# Altium PCB PCB1.PcbDoc (part 10 of 10)
Units mil, origin at the board's own origin, x right, y up, seen from the top; angles counter-clockwise.
Board outline 3664.99 x 3139.98 mil, 2 copper layers (Top Layer, Bottom Layer); 40 components, 43 nets, 180 pads, 41 vias.
Unrouted connection lines stored in the file: 5.
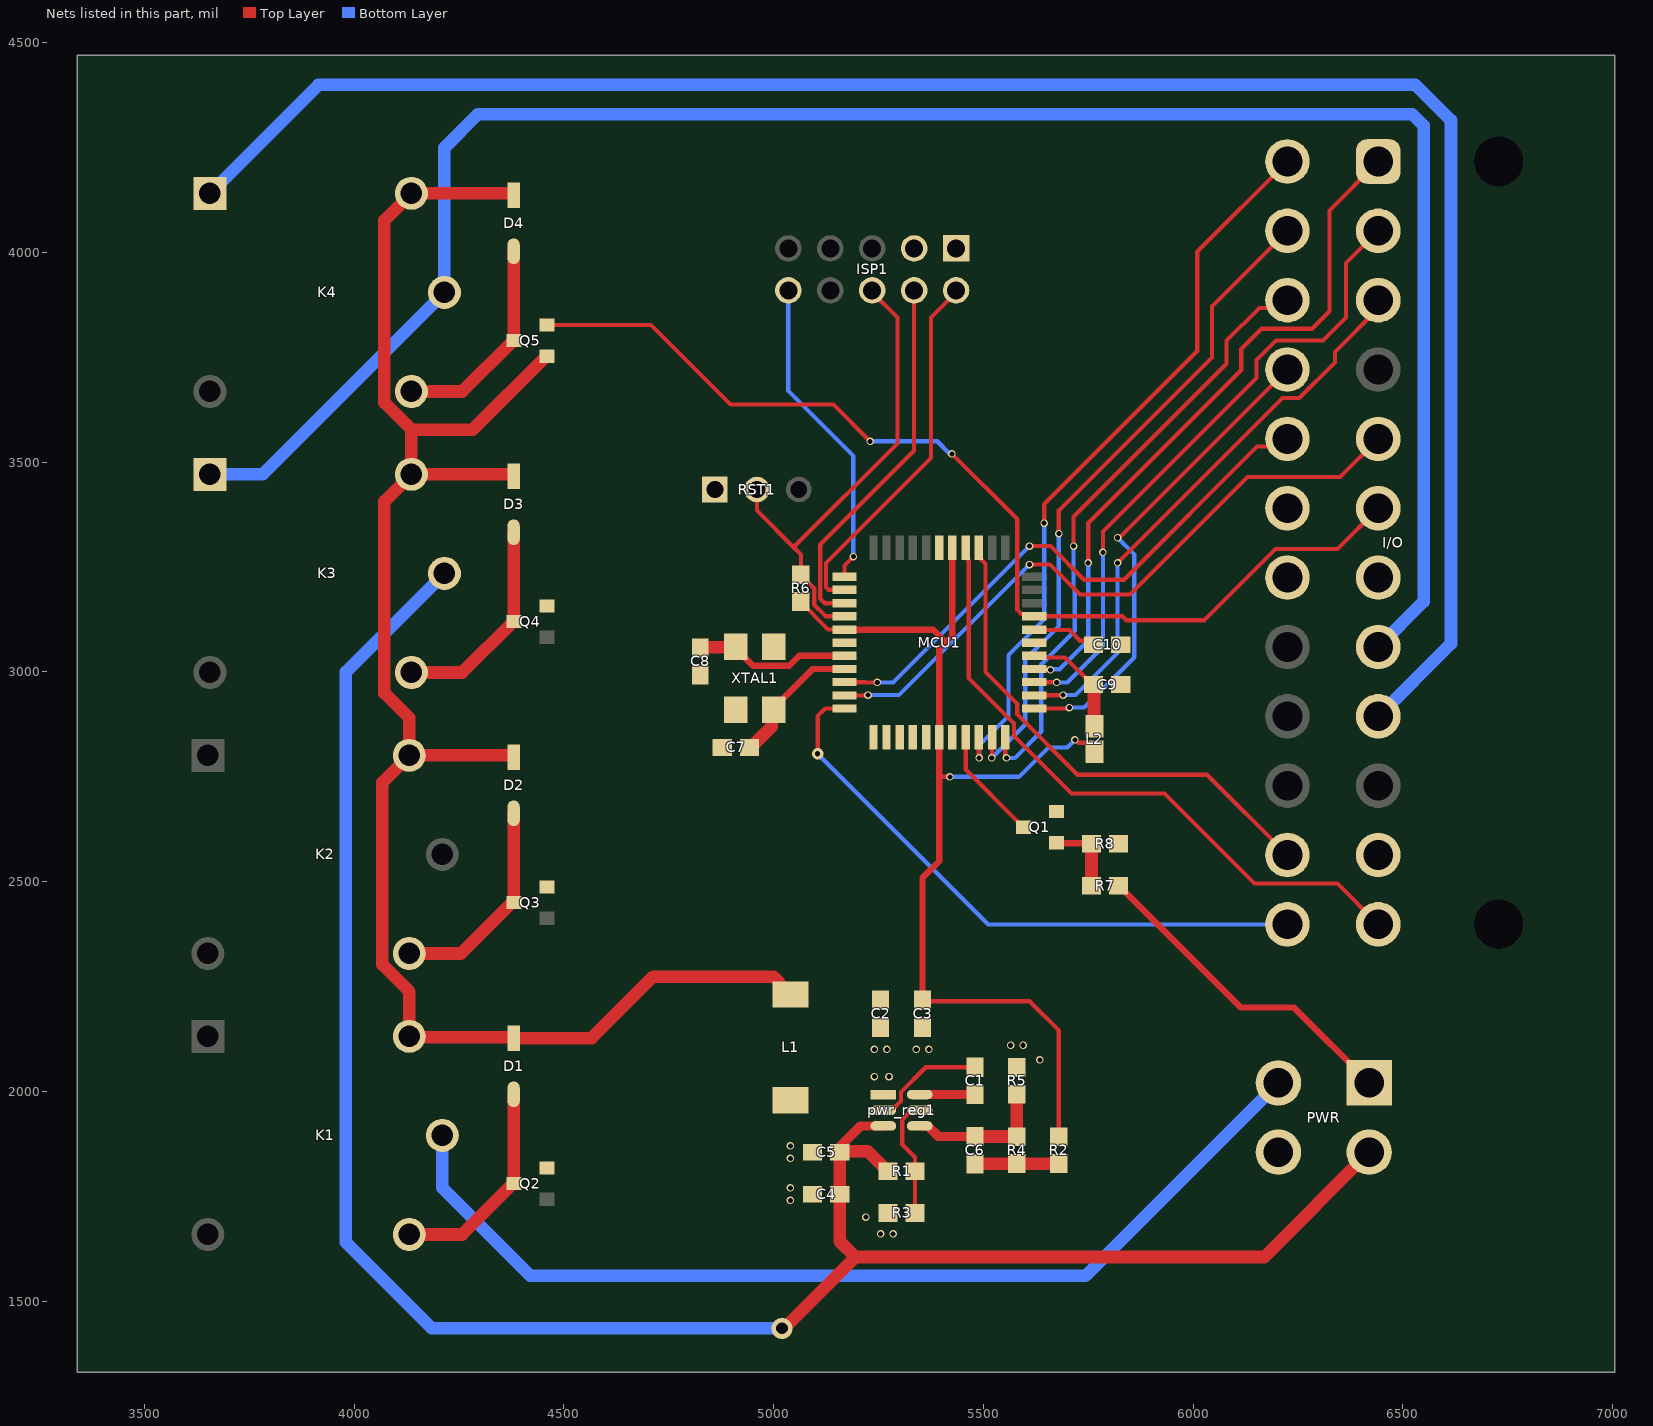
[diagram p10: the nets of this part, all layers, seen from the top]

## Footprints (in the part's own frame and the unit in brackets; to place one, negate y for a bottom-side part, rotate by r counter-clockwise, add the part's x,y. Pads: shape width x height; smd on the part's side, far side on the other; paste and mask are expansions set on the pad)
3M-30310-6002HB-10_V [mm] "CONN, 10-Leads, Body 20.3x8.4mm, Pitch 2.54mm"
  rect 1.6x1.6 hole 1.09: 1(-5.08,-1.27)
  round 1.6 hole 1.09: 2(-5.08,1.27) 3(-2.54,-1.27) 4(-2.54,1.27) 5(0,-1.27) 6(0,1.27) 7(2.54,-1.27) 8(2.54,1.27) 9(5.08,-1.27) 10(5.08,1.27)
  silkscreen extent -10.15,-4.92 10.15,4.58, body extent -10.15,-4.2 10.15,4.61, height 8.89
649024227222 [mm] "4.20mm Male Dual Row Angled Header with Mounting Pegs, 24p"
  rrect50% 2.7x2.7 hole 1.8: 1(23.1,7.5)
  round 2.7 hole 1.8: 2(18.9,7.5) 3(14.7,7.5) 4(10.5,7.5) 5(6.3,7.5) 6(2.1,7.5) 7(-2.1,7.5) 8(-6.3,7.5) 9(-10.5,7.5) 10(-14.7,7.5) 11(-18.9,7.5) 12(-23.1,7.5) 13(23.1,13) 14(18.9,13) 15(14.7,13) 16(10.5,13) 17(6.3,13) 18(2.1,13) 19(-2.1,13) 20(-6.3,13) 21(-10.5,13) 22(-14.7,13) 23(-18.9,13) 24(-23.1,13)
  round 3 hole 3 unplated: MH1(-23.1,0.2) MH2(23.1,0.2)
  silkscreen extent -25.95,-6.52 25.95,6.52, body extent -25.8,-6.4 26.1,13.57, height 11.43
FP-1-1721150-0-MFG [mm]
  rect 2x2 hole 1.3 paste-2539.97 mask+0: 1(-6.2,6)
  round 2 hole 1.3 paste-2539.97 mask+0: 2(6,6) 3(8,0) 4(-6.2,-6) 5(6,-6)
  silkscreen extent -9.85,-8 9.85,8.62, body extent -9.95,-8.1 9.95,8.1, height 0.25
FP-1586042-4-MFG [mm]
  rect 2.75x2.75 hole 1.8 paste-2539.97 mask+0: 1(2.1,7.6)
  round 2.75 hole 1.8 paste-2539.97 mask+0: 2(-2.1,7.6) 3(2.1,13.1) 4(-2.1,13.1)
  silkscreen extent -4.97,-7 5.62,7.72, body extent -5.07,-7.1 5.07,14.58, height 0.25
FP-CBMF1608-IPC_A [mil]
  rect 53.36x43.55 smd paste+0 mask+0: 1(-30.53,0) 2(30.53,0)
  silkscreen extent -57,-38 57,38, body extent -77,-41 77,41, height 10
FP-CL10-IPC_A [mil]
  rect 45.6x39.85 smd paste+0 mask+0: 1(-32.56,0) 2(32.56,0)
  silkscreen extent -55,-36 55,36, body extent -75,-40 75,40, height 10
FP-CRCW0603-e3-IPC_A [mil]
  rect 44.69x41.82 smd paste+0 mask+0: 1(-32.1,0) 2(32.1,0)
  silkscreen extent -30,-37 30,37, body extent -74,-41 74,41, height 10
FP-DDC0006A-IPC_B [mm]
  rect 1.554x0.572 smd paste+0 mask+0: 1(-1.1,0.95)
  rrect100% 1.554x0.572 smd paste+0 mask+0: 2(-1.1,0) 3(-1.1,-0.95) 4(1.1,-0.95) 5(1.1,0) 6(1.1,0.95)
  silkscreen extent -2.57,-1.7 1.4,1.7, body extent -2.13,-1.7 2.13,1.7, height 0.25
FP-LFXTAL055663REEL-MFG [mm]
  rect 1.6x1.4 smd paste+0 mask+0: 1(-1.9,-1.15) 2(1.9,-1.15) 3(1.9,1.15) 4(-1.9,1.15)
  silkscreen extent -3.42,-1.67 2.58,1.67, body extent -2.8,-1.95 2.8,1.95, height 0.25
FP-SOD123-IPC_A [mil]
  rect 61.32x29.23 smd paste+0 mask+0: 1(-66.94,0)
  rrect100% 61.32x29.23 smd paste+0 mask+0: 2(66.94,0)
  silkscreen extent -134,-31 52,31, body extent -117,-50 117,50, height 10
FP-SOT23-MFG [mm]
  rect 0.9x0.8 smd paste+0 mask+0: 1(-1,0.95) 2(-1,-0.95) 3(1,0)
  silkscreen extent -0.18,-1.5 0.7,1.5, body extent -1.55,-1.6 1.55,1.6, height 0.25
MOLX-22-28-4033_V [mm] "THD, 3-Leads, Body 7.62x2.49mm, Pitch 2.54mm"
  rect 1.55x1.55 hole 1.02: 1(-2.54,0)
  round 1.55 hole 1.02: 2(0,0) 3(2.54,0)
  silkscreen extent -4.58,-1.25 3.81,1.25, body extent -3.81,-1.24 3.81,1.24, height 8.38
QFP80P1200X1200X120-44N [mil]
  rect 58x20 smd: 1(-226,157) 2(-226,126) 3(-226,94) 4(-226,63) 5(-226,31) 6(-226,0) 7(-226,-31) 8(-226,-63) 9(-226,-94) 10(-226,-126) 11(-226,-157) 23(226,-157) 24(226,-126) 25(226,-94) 26(226,-63) 27(226,-31) 28(226,0) 29(226,31) 30(226,63) 31(226,94) 32(226,126) 33(226,157)
  rect 20x58 smd: 12(-157,-226) 13(-126,-226) 14(-94,-226) 15(-63,-226) 16(-31,-226) 17(0,-226) 18(31,-226) 19(63,-226) 20(94,-226) 21(126,-226) 22(157,-226) 34(157,226) 35(126,226) 36(94,226) 37(63,226) 38(31,226) 39(0,226) 40(-31,226) 41(-63,226) 42(-94,226) 43(-126,226) 44(-157,226)
  silkscreen extent -309,-309 308,311, body extent -236,-236 236,236, height 47
WE-PD_7345 [mm] "SMT Shielded Power Inductor, 2-leads, body 7.3x7.3mm"
  rect 1.6x2.2 smd: 1(-3.2,0) 2(3.2,0)
  Top Layer keep-out region: -3.65,-3.65 -3.65,-1.3 -2.2,-1.3 -2.2,1.3 -3.65,1.3 -3.65,3.65 3.65,3.65 3.65,1.3 2.2,1.3 2.2,-1.3 3.65,-1.3 3.65,-3.65
  silkscreen extent -4.62,-3.75 3.75,3.75, body extent -3.65,-3.65 3.65,3.65, height 3.91

## Part data
C1: library part CMP-13271-000587-1, "Cap Ceramic 0.1uF 25V SMD 0603", Case/Package=0603, Dielectric=X7R, Max Operating Temperature=125°C, Min Operating Temperature=-55°C, Package Quantity=10000, Tolerance=10%, Voltage=50V, Capacitance=0.1uF, Depth=0.8mm, Height=0.8mm, Lead Free="Lead Free", Length=1.6mm, Material=Ceramic, Mount="Surface Mount", Packaging="Tape and Reel", Radiation Hardening=No, Thickness=0.035inch, Voltage Rating=50V, Voltage Rating (DC)=50V, Width=0.031inch
C2 C3: library part CMP-13271-000587-1, "Cap Ceramic 22uF 25V X7R LOW ESR SMD 0603", Case/Package=0603, Dielectric=X7R, Max Operating Temperature=125°C, Min Operating Temperature=-55°C, Package Quantity=10000, Tolerance=10%, Voltage=50V, Capacitance=22uF, Depth=0.8mm, Height=0.8mm, Lead Free="Lead Free", Length=1.6mm, Material=Ceramic, Mount="Surface Mount", Packaging="Tape and Reel", Radiation Hardening=No, Thickness=0.035inch, Voltage Rating=50V, Voltage Rating (DC)=50V, Width=0.031inch
C4: library part CMP-13271-000587-1, "Cap Ceramic 10uF 25V SMD 0603", Case/Package=0603, Dielectric=X7R, Max Operating Temperature=125°C, Min Operating Temperature=-55°C, Package Quantity=10000, Tolerance=10%, Voltage=50V, Capacitance=10uF, Depth=0.8mm, Height=0.8mm, Lead Free="Lead Free", Length=1.6mm, Material=Ceramic, Mount="Surface Mount", Packaging="Tape and Reel", Radiation Hardening=No, Thickness=0.035inch, Voltage Rating=50V, Voltage Rating (DC)=50V, Width=0.031inch
C5: library part CMP-13271-000587-1, "Cap Ceramic 1uF 25V SMD 0603", Case/Package=0603, Dielectric=X7R, Max Operating Temperature=125°C, Min Operating Temperature=-55°C, Package Quantity=10000, Tolerance=10%, Voltage=50V, Capacitance=1uF, Depth=0.8mm, Height=0.8mm, Lead Free="Lead Free", Length=1.6mm, Material=Ceramic, Mount="Surface Mount", Packaging="Tape and Reel", Radiation Hardening=No, Thickness=0.035inch, Voltage Rating=50V, Voltage Rating (DC)=50V, Width=0.031inch
C6: library part CMP-13271-000587-1, "Cap Ceramic 75pF 25V SMD 0603", Case/Package=0603, Dielectric=X7R, Max Operating Temperature=125°C, Min Operating Temperature=-55°C, Package Quantity=10000, Tolerance=10%, Voltage=50V, Capacitance=75pF, Depth=0.8mm, Height=0.8mm, Lead Free="Lead Free", Length=1.6mm, Material=Ceramic, Mount="Surface Mount", Packaging="Tape and Reel", Radiation Hardening=No, Thickness=0.035inch, Voltage Rating=50V, Voltage Rating (DC)=50V, Width=0.031inch
C7 C8: library part CMP-13271-000587-1, "Cap Ceramic 22pF 25V SMD 0603", Case/Package=0603, Dielectric=X7R, Max Operating Temperature=125°C, Min Operating Temperature=-55°C, Package Quantity=10000, Tolerance=10%, Voltage=50V, Capacitance=22pF, Depth=0.8mm, Height=0.8mm, Lead Free="Lead Free", Length=1.6mm, Material=Ceramic, Mount="Surface Mount", Packaging="Tape and Reel", Radiation Hardening=No, Thickness=0.035inch, Voltage Rating=50V, Voltage Rating (DC)=50V, Width=0.031inch
C9 C10: library part CMP-13271-000587-1, "Cap Ceramic 100nF 50V X7R ±10% Pad SMD 0603 +125°C T/R", Case/Package=0603, Dielectric=X7R, Max Operating Temperature=125°C, Min Operating Temperature=-55°C, Package Quantity=10000, Tolerance=10%, Voltage=50V, Capacitance=100nF, Depth=0.8mm, Height=0.8mm, Lead Free="Lead Free", Length=1.6mm, Material=Ceramic, Mount="Surface Mount", Packaging="Tape and Reel", Radiation Hardening=No, Thickness=0.035inch, Voltage Rating=50V, Voltage Rating (DC)=50V, Width=0.031inch
D1 D2 D3 D4: library part CMP-0303-00003-3, "DIODE SCHOTTKY 40V 1A SOD123", Average Rectified Current=1A, Capacitance=110pF, Case/Package=SOD-123-2, Forward Voltage=450mV, Max Forward Surge Current (Ifsm)=25A, Max Operating Temperature=125°C, Max Power Dissipation=450mW, Max Repetitive Reverse Voltage (Vrrm)=40V, Min Operating Temperature=-65°C, Package Quantity=3000, Peak Reverse Current=50uA, Contact Plating=Tin, Current Rating=1A, Element Configuration=Single, Forward Current=1A, Height=1.25mm, Lead Free="Lead Free", Length=2.85mm, Max Reverse Voltage (DC)=40V, Number of Pins=2, Output Current=1A, Packaging="Tape and Reel", Peak Non-Repetitive Surge Current=25A, Polarity=Standard, Radiation Hardening=No, REACH SVHC="No SVHC", Termination=SMD/SMT, Voltage Rating (DC)=40V, Weight=0.000353oz, Width=1.7mm
I/O: library part CMP-1502-00539-2, Color=White, Contact Resistance=10mΩ, Current Rating=6A, Insulation Resistance=1GΩ, Max Operating Temperature=105°C, Min Operating Temperature=-40°C, Operating Supply Voltage=600V, Connector Type="Male Pin, Socket", Contact Material=Copper, Contact Plating=Tin, Fastening Type=Ramp, Gender=Male, Height=12.8mm, Lead Pitch=4.2mm, Length=51.6mm, Mount="Through Hole", NexarPartId=23024662, Number of Contacts=24, Number of Pins=24, Number of Positions=24, Number of Rows=2, Pitch=4.2mm, REACH SVHC=Unknown, RoHS=Compliant, Row Spacing=4.191mm, Termination=Solder, Width=51.7mm
ISP1: library part CMP-2000-05031-1, "Male Header, Pitch 2.54 mm, 2 x 5 Position, Height 9.3 mm, Tail Length 2.79 mm, -55 to 105 degC, RoHS, Bulk", Current Rating=1A, Manufacturer=3M, Brand=3MElectronicSolutionsDivision, Contact Gender=Pin(Male), Contact Material=Brass, Contact Plating=Gold, Datasheet URL=http://datasheet.octopart.com/30310-6002HB-3M-datasheet-11537585.pdf, Datasheet Version=Apr-12, Factory Pack Quantity=1000, Housing Material=Polyester, Manufacturer URL=http://www.3m.com/, Mating Post Length=5.99mm, Mounting Angle=Straight, Mounting Style=StraightPin, Number of Positions=10Position, Number of Rows=2Row, Packaging=Tray, Pitch=2.54mm, Product=Headers, Product Category=Headers&WireHousings, RoHS=Details, Row Spacing=2.54mm, Series=303, Termination Post Length=2.79mm, Termination Style=ThroughHole, Type=Shrouded
K1 K2 K3 K4: library part CMP-03395-000112-1, "Relpol / RM51-3011-85-1005 / RELAY 10A 5V", Ambient Temperature Range High=+70°C, Ambient Temperature Range Low=-30°C, Coil Power=360mW, Coil Resistance=70Ω, Coil Voltage=5V, Current Rating=10A, Manufacturer=TE, Manufacturer Part Number=1-1721150-0, Automotive=No, Category=Relay, Coil Type=Non-Latching, ComponentLink2Description=Datasheet, ComponentLink2URL=https://www.te.com/usa-en/product-1-1721150-0.html?te_bu=Cor&te_type=other&te_campaign=oct_glo_cor-oct-global-oth-prtnr-fy19-oct-octo-buy-bom_sma-298_2&elqCampaignId=35216, Device Class L1=Electromechanical, Device Class L2=Relays, Device Class L3="Power Relays", Digikey Description="RELAY GEN PURPOSE SPDT 10A 5V", Height=16.3mm, Lead Free=Yes, Number of Contacts=1, Octopart=https://octopart.com/1-1721150-0-te+connectivity-41294869, Package=1-1721150-0, RoHS=TRUE, Standoff Height=0.2mm, Switching Current=10A, Throw Configuration=SPDT
L1: library part CMP-0227-00155-2, "15uF, 2.7A  HPI0630-150", Ambient Temperature Range High=85°C, Ambient Temperature Range Low=-40°C, Current Rating=2.7A, DC Resistance (DCR)=110mΩ, Inductance=15µH, Max Operating Temperature=125°C, Self Resonant Frequency=9.5MHz, Tolerance=20%, Depth=7.3mm, Height=4.5mm, Length=7.3mm, Max DC Current=2.7A, Min Operating Temperature=-40°C, NexarPartId=31136509, Number of Pins=2, Packaging="Tape & Reel", RoHS=Compliant, Shielding=Shielded, Width=7.3mm
L2: library part CMP-14484-000247-1, "SMD Inductors 10uH ±10% 0.38A 0.468Ω 0603", Case Code (Imperial)=0603, Case Code (Metric)=1608, Current Rating=380mA, DC Resistance (DCR)=468mR, Inductance Tolerance=10%, Max Operating Temperature=105°C, Min Operating Temperature=-40°C, Package Quantity=3000, Resistor Type=Wirewound, Saturation Current=115mA, Self Resonant Frequency=32MHz, Test Frequency=2.52MHz, Case/Package=0603, Core Material=Ferrite, DC Current=380mA, Depth=1mm, Halogen Free="Halogen Free", Height=0.8mm, Height - Seated (Max)=0.039inch, Inductance=10uH, Lead Free="Lead Free", Length=0.063inch, Max DC Current=380mA, Military Standard=Not, Mount="Surface Mount", Packaging="Tape and Reel", Radiation Hardening=No, RoHS Compliant=Yes, Series=CB, Shielding=Unshielded, Termination=SMD/SMT, Tolerance=10%, Width=0.031inch
MCU1: "AVR AVRÂ® ATmega Microcontroller IC 8-Bit 16MHz 32KB (16K x 16) FLASH 44-TQFP (10x10)", Package="TQFP-44 Microchip", Check_prices=https://www.snapeda.com/parts/ATMEGA32A-AU/Microchip/view-part/?ref=eda, MF=Microchip, MP=ATMEGA32A-AU, SnapEDA_Link=https://www.snapeda.com/parts/ATMEGA32A-AU/Microchip/view-part/?ref=snap
PWR: library part CMP-03369-000114-1, "CONN HEADER R/A 4POS 4.2MM", Contact Current Rating=9A, Flammability Rating="UL94 V-0", Housing Color=Natural, Max Operating Temperature=221°C, Max Voltage Rating (AC)=600V, Min Operating Temperature=-40°C, Number of Power Positions=4, Package Quantity=400, Approvals=CSA, Circuit Application=Power, Connector System=Wire-to-Board, Connector Type=Pin, Contact Material=Brass, Contact Plating=Tin, Contact Retention="No (Without)", Contact Type="Male Pin", Current Rating=9A, ELV=Compliant, Fastening Type=Ramp, Height=0.386inch, Housing Material=Nylon, Insulation Diameter=0.122inch, Lead Free="Lead Free", Length=9.6mm, Mating Alignment="Yes (With)", Mating Retention="Yes (With)", Mount="Through Hole", Number of Circuits=4, Number of Contacts=4, Number of Ports=1, Number of Positions=4, Number of Rows=2, Number of Terminals/Pins=4, Orientation="Right Angle", Packaging=Tray, PCB Mount Alignment="No (Without)", PCB Mount Retention=Without, PCB Mounting Orientation="Right Angle", PCB Thickness=0.063mm, Pitch=4.2mm, Plating Thickness=78.73um, Radiation Hardening=No, RoHS Compliant=Yes, Row Spacing=4.2inch, Sealable="No (Without)", Selectively Loaded="No (Without)", Series=VAL-U-LOK, Termination=Solder, VDE Tested=No, Voltage Rating=600V, Width=13mm
pwr_reg1: library part CMP-04918-000439-1, "IC REG BUCK ADJ 2A TSOT23-6", Case/Package=SOT-23-6, Max Input Voltage=28V, Max Operating Temperature=125°C, Min Input Voltage=4.5V, Min Operating Temperature=-40°C, Min Output Voltage=596mV, Output Current=2A, Quiescent Current=40uA, Switching Frequency=500kHz, Lead Free="Lead Free", Max Output Voltage=28V, Mount="Surface Mount", Number of Outputs=1, Output Configuration=Positive, Output Type=Adjustable, Packaging="Tape and Reel", RoHS Compliant=Yes, Synchronous Rectifier=Yes
Q1 Q2 Q3 Q4 Q5: library part CMP-2000-04929-2, "MOSFET N-CH 60V 115MA SOT23-3", Case/Package=SOT-23, Continuous Drain Current (ID)=115mA, Drain to Source Breakdown Voltage=70V, Drain to Source Resistance=7.5R, Drain to Source Voltage (Vdss)=60V, Gate to Source Voltage (Vgs)=20V, Input Capacitance=50pF, Max Operating Temperature=150°C, Max Power Dissipation=300mW, Min Operating Temperature=-55°C, Package Quantity=3000, Power Dissipation=540mW, Threshold Voltage=2.5V, Contact Plating=Tin, Current Rating=115mA, Dual Supply Voltage=60V, Element Configuration=Single, Fall Time=5.6ns, Height=1mm, Lead Free="Lead Free", Length=2.9mm, Mount="Surface Mount", Nominal Vgs=2.5V, Number of Channels=1, Number of Elements=1, Number of Pins=3, On-State Resistance=7.5R, Packaging="Tape and Reel", Radiation Hardening=No, Rds On Max=7.5R, REACH SVHC="No SVHC", Rise Time=3ns, Termination=SMD/SMT, Turn-Off Delay Time=11ns, Turn-On Delay Time=7ns, Voltage=60V, Voltage Rating (DC)=60V, Weight=0.000282oz, Width=1.3mm
R1: library part CMP-2000-03245-2, "511kΩ, 0.1W, 0603", Case Code (Imperial)=0603, Case Code (Metric)=1608, Max Operating Temperature=155°C, Max Power Dissipation=100mW, Min Operating Temperature=-55°C, Package Quantity=10, Temperature Coefficient=100ppm/°C, Tolerance=1%, Voltage Rating=75V, Case/Package=0603, Composition="Thick Film", Contact Plating=Tin, Depth=0.85mm, Features="Automotive AEC-Q200", Height=0.45mm, Lead Free="Lead Free", Length=1.55mm, Military Standard=Not, Mount="Surface Mount", Number of Terminations=2, Packaging="Tape and Reel", Power Rating=100mW, Radiation Hardening=No, Resistance=511k, Termination=SMD/SMT, Voltage Rating (DC)=75V, Weight=7.1E-05oz, Width=0.033inch
R2: library part CMP-2000-03245-2, "49.9Ω, 0.1W, 0603", Case Code (Imperial)=0603, Case Code (Metric)=1608, Max Operating Temperature=155°C, Max Power Dissipation=100mW, Min Operating Temperature=-55°C, Package Quantity=10, Resistance=49.9, Temperature Coefficient=100ppm/°C, Tolerance=1%, Voltage Rating=75V, Case/Package=0603, Composition="Thick Film", Contact Plating=Tin, Depth=0.85mm, Features="Automotive AEC-Q200", Height=0.45mm, Lead Free="Lead Free", Length=1.55mm, Military Standard=Not, Mount="Surface Mount", Number of Terminations=2, Packaging="Tape and Reel", Power Rating=100mW, Radiation Hardening=No, Termination=SMD/SMT, Voltage Rating (DC)=75V, Weight=7.1E-05oz, Width=0.033inch
R3: library part CMP-2000-03245-2, "105kΩ, 0.1W, 0603", Case Code (Imperial)=0603, Case Code (Metric)=1608, Max Operating Temperature=155°C, Max Power Dissipation=100mW, Min Operating Temperature=-55°C, Package Quantity=10, Temperature Coefficient=100ppm/°C, Tolerance=1%, Voltage Rating=75V, Case/Package=0603, Composition="Thick Film", Contact Plating=Tin, Depth=0.85mm, Features="Automotive AEC-Q200", Height=0.45mm, Lead Free="Lead Free", Length=1.55mm, Military Standard=Not, Mount="Surface Mount", Number of Terminations=2, Packaging="Tape and Reel", Power Rating=100mW, Radiation Hardening=No, Resistance=105k, Termination=SMD/SMT, Voltage Rating (DC)=75V, Weight=7.1E-05oz, Width=0.033inch
R4: library part CMP-2000-03245-2, "100kΩ, 0.1W, 0603", Case Code (Imperial)=0603, Case Code (Metric)=1608, Max Operating Temperature=155°C, Max Power Dissipation=100mW, Min Operating Temperature=-55°C, Package Quantity=10, Temperature Coefficient=100ppm/°C, Tolerance=1%, Voltage Rating=75V, Case/Package=0603, Composition="Thick Film", Contact Plating=Tin, Depth=0.85mm, Features="Automotive AEC-Q200", Height=0.45mm, Lead Free="Lead Free", Length=1.55mm, Military Standard=Not, Mount="Surface Mount", Number of Terminations=2, Packaging="Tape and Reel", Power Rating=100mW, Radiation Hardening=No, Resistance=100k, Termination=SMD/SMT, Voltage Rating (DC)=75V, Weight=7.1E-05oz, Width=0.033inch
R5: library part CMP-2000-03245-2, "13.3kΩ, 0.1W, 0603", Case Code (Imperial)=0603, Case Code (Metric)=1608, Max Operating Temperature=155°C, Max Power Dissipation=100mW, Min Operating Temperature=-55°C, Package Quantity=10, Temperature Coefficient=100ppm/°C, Tolerance=1%, Voltage Rating=75V, Case/Package=0603, Composition="Thick Film", Contact Plating=Tin, Depth=0.85mm, Features="Automotive AEC-Q200", Height=0.45mm, Lead Free="Lead Free", Length=1.55mm, Military Standard=Not, Mount="Surface Mount", Number of Terminations=2, Packaging="Tape and Reel", Power Rating=100mW, Radiation Hardening=No, Resistance=13.3k, Termination=SMD/SMT, Voltage Rating (DC)=75V, Weight=7.1E-05oz, Width=0.033inch
R6: library part CMP-2000-03245-2, "10kΩ, 0.1W, 0603", Case Code (Imperial)=0603, Case Code (Metric)=1608, Max Operating Temperature=155°C, Max Power Dissipation=100mW, Min Operating Temperature=-55°C, Package Quantity=10, Temperature Coefficient=100ppm/°C, Tolerance=1%, Voltage Rating=75V, Case/Package=0603, Composition="Thick Film", Contact Plating=Tin, Depth=0.85mm, Features="Automotive AEC-Q200", Height=0.45mm, Lead Free="Lead Free", Length=1.55mm, Military Standard=Not, Mount="Surface Mount", Number of Terminations=2, Packaging="Tape and Reel", Power Rating=100mW, Radiation Hardening=No, Resistance=10k, Termination=SMD/SMT, Voltage Rating (DC)=75V, Weight=7.1E-05oz, Width=0.033inch
R7: library part CMP-2000-03245-2, "220kΩ, 0.1W, 0603", Case Code (Imperial)=0603, Case Code (Metric)=1608, Max Operating Temperature=155°C, Max Power Dissipation=100mW, Min Operating Temperature=-55°C, Package Quantity=10, Resistance=10k, Temperature Coefficient=100ppm/°C, Tolerance=1%, Voltage Rating=75V, Case/Package=0603, Composition="Thick Film", Contact Plating=Tin, Depth=0.85mm, Features="Automotive AEC-Q200", Height=0.45mm, Lead Free="Lead Free", Length=1.55mm, Military Standard=Not, Mount="Surface Mount", Number of Terminations=2, Packaging="Tape and Reel", Power Rating=100mW, Radiation Hardening=No, Termination=SMD/SMT, Voltage Rating (DC)=75V, Weight=7.1E-05oz, Width=0.033inch
R8: library part CMP-2000-03245-2, "150kΩ, 0.1W, 0603", Case Code (Imperial)=0603, Case Code (Metric)=1608, Max Operating Temperature=155°C, Max Power Dissipation=100mW, Min Operating Temperature=-55°C, Package Quantity=10, Resistance=10k, Temperature Coefficient=100ppm/°C, Tolerance=1%, Voltage Rating=75V, Case/Package=0603, Composition="Thick Film", Contact Plating=Tin, Depth=0.85mm, Features="Automotive AEC-Q200", Height=0.45mm, Lead Free="Lead Free", Length=1.55mm, Military Standard=Not, Mount="Surface Mount", Number of Terminations=2, Packaging="Tape and Reel", Power Rating=100mW, Radiation Hardening=No, Termination=SMD/SMT, Voltage Rating (DC)=75V, Weight=7.1E-05oz, Width=0.033inch
RST1: library part CMP-1676-00001-5, "Male Header, Pitch 2.54 mm, 1 x 3 Position, Height 8.38 mm, Tail Length 3.18 mm, RoHS, Bulk", Colour=Black, Current Rating="4 A", Manufacturer=Molex, Max Operating Temperature="75 degC", Min Operating Temperature="0 degC", Package Quantity=1, Voltage Rating="250 V", ComponentLink1Description="Manufacturer URL", ComponentLink1URL=http://www.molex.com/, ComponentLink2Description=Datasheet, ComponentLink2URL=http://www.molex.com/pdm_docs/sd/022284033_sd.pdf, Contact Finish=Gold, Contact Material=Brass, Contact Plating=Gold, DatasheetVersion="Rev. G, 01/2012", Height="8.38 mm", Lead Pitch="0.1 inch", Length="7.62 mm", Mount="Through Hole", Mounting Technology="Through Hole", PackageDescription="Male Header, Pitch 2.54 mm, 1 x 3 Position, Height 8.38 mm, Tail Length 3.18 mm", PackageReference=22-28-4033, Packaging=Bulk, Pins=3, REACH SVHC=Unknown, RoHSCompliant=true, Rows=1
XTAL1: library part CMP-96504-000007-1, "LFXTAL055663REEL / CRYSTAL 8.0000MHZ 18PF SMD", RoHS Compliant=Yes

## Via types
v1: diameter 18, hole 12, Top Layer to Bottom Layer, tented both sides, 39 vias
v2: diameter 28, hole 12, Top Layer to Bottom Layer, tented both sides, 1 vias
v3: diameter 50, hole 28, Top Layer to Bottom Layer, tented both sides, 1 vias

## Nets (pads, with @x,y where several pads share a name; then routed paths per layer and width w, separated by ;. In a path a pad name is that pad's centre, name@x,y a point inside that pad or via, vN(x,y) a via of type N, cw(c..) or ccw(c..) an arc to the next point about the centre after c; other vN are vias at no path point)
BLINK1: I/O.8 K3.1 K4.3 | length 4751
  Bottom Layer w30: K3.1@3655.91,3471.22 3781.18,3471.22 K4.3@4214.96,3905 4214.96,4249.96 4295,4330 6522.43,4330 6550,4302.43 6550,3168.11 I/O.8@6441.54,3059.65
BLINK2: I/O.9 K4.1 | length 4594.1
  Bottom Layer w30: K4.1@3655.91,4141.22 3914.69,4400 6530,4400 6615,4315 6615,3067.76 I/O.9@6441.54,2894.29
BLINK_SWITCH_(GND): I/O.6 MCU1.14 MCU1.30 Q5.2 | length 2510.9
  Top Layer w10: Q5.2@4459.37,3827.4 4707.6,3827.4 4897.35,3637.65 5142.35,3637.65 v1(5230,3550) ; v1(5425,3520) 5581,3364 5581,3147.87 5590.14,3138.73 5591.14,3138.73 5591.87,3138 5616,3138 MCU1.30@5621,3133 5831.29,3133 5840.81,3123.48 6027.1,3123.48 6196.77,3293.15 6344.33,3293.15 I/O.6@6441.54,3390.35
  Bottom Layer w10: v1(5230,3550) 5390,3550 5420,3520 v1(5425,3520)
BUZZER: I/O.11 MCU1.16
DISP_KEY: I/O.19 MCU1.12
FOTO: I/O.23 MCU1.36 | length 1218.4
  Top Layer w10: MCU1.36@5489,3296 5494,3291 5494,3268.78 5500,3262.78 5500,3262.44 5505,3257.44 5505,3000 5581,2924 5581,2898.44 5724.44,2755 6033.58,2755 I/O.23@6225,2563.58
GND: C2.2 C3.2 C4.2 C5.2 C7.1 C8.1 C9.2 C10.2 ISP1.1 ISP1.3 MCU1.6 MCU1.18 MCU1.28 MCU1.39 PWR.4 pwr_reg1.1 Q1.2 Q2.2 Q3.2 Q4.2 R3.2 R5.2 R8.1 RST1.1 XTAL1.2 XTAL1.4 | length 2.9
  Top Layer w4: C5.2@5089.57,1855 C5.2@5092.44,1855
  other v1: 5255,1660 5285,1660 5220,1700 5040,1740 5040,1770 5040,1840 5040,1870 5240,2035 5275,2035 5635,2075 5240,2100 5270,2100 5340,2100 5370,2100 5565,2110 5595,2110
IDLE: MCU1.19 Q1.3 | length 272.2
  Top Layer w10: MCU1.19@5458,2844 5458,2767.63 5582.91,2642.72 5582.91,2640.75 5593.66,2630 Q1.3@5595.63,2630
LCD_D4: I/O.16 MCU1.23 | length 1162.2
  Top Layer w10: MCU1.23@5621,2913 5703,2913 v1(5705,2915) ; v1(5820,3320) 5821.53,3321.53 5825.47,3321.53 I/O.16@6225,3721.06
  Bottom Layer w10: v1(5705,2915) 5740,2915 5860,3035 5860,3280 v1(5820,3320)
LCD_D5: I/O.3 MCU1.24 | length 1363.3
  Top Layer w10: MCU1.24@5621,2944 5621.5,2944.5 5689.5,2944.5 v1(5690,2945) ; v1(5820,3260) 6212.91,3652.91 6253.23,3652.91 6338.17,3737.86 6338.17,3763.17 6441.54,3866.54 I/O.3@6441.54,3886.42
  Bottom Layer w10: v1(5690,2945) 5720,2945 5820,3045 v1(5820,3260)
LCD_D6: I/O.2 MCU1.25 | length 1529.2
  Top Layer w10: MCU1.25@5621,2976 5621.5,2975.5 5674.5,2975.5 v1(5675,2975) ; v1(5785,3285) 5785,3335 6151.28,3701.28 6151.28,3743.72 6197.56,3790 6310,3790 6365,3845 6365,3975.24 I/O.2@6441.54,4051.77
  Bottom Layer w10: v1(5675,2975) 5700,2975 5785,3060 v1(5785,3285)
LCD_D7: I/O.1 MCU1.26 | length 1657.7
  Top Layer w10: MCU1.26@5621,3007 5622,3006 5659,3006 v1(5660,3005) ; v1(5750,3260) 5750,3355 6115,3720 6115,3770 6163.27,3818.27 6283.27,3818.27 6325,3860 6325,4100.59 I/O.1@6441.54,4217.13
  Bottom Layer w10: v1(5660,3005) 5661.53,3006.53 5681.53,3006.53 5750,3075 v1(5750,3260)
LCD_E: I/O.15 MCU1.22 | length 1461.8
  Top Layer w10: MCU1.22@5552,2844 5552,2803 5555,2800 v1(5555,2795) ; v1(5715,3300) 5715,3370 6080,3735 6080,3790 6157.99,3867.99 6206.57,3867.99 I/O.15@6225,3886.42
  Bottom Layer w10: v1(5555,2795) 5575,2795 5638,2858 5638,3018 5718,3098 5718,3196.42 5715,3199.42 v1(5715,3300)
LCD_RS: I/O.13 MCU1.20 | length 1776
  Top Layer w10: MCU1.20@5489,2844 5489,2796 v1(5490,2795) ; v1(5645,3355) 5645,3400 6010,3765 6010,4002.13 I/O.13@6225,4217.13
  Bottom Layer w10: v1(5490,2795) 5490,2825 5560,2895 5560,3040 5645,3125 v1(5645,3355)
LCD_RW: I/O.14 MCU1.21 | length 1598.2
  Top Layer w10: v1(5520,2795) 5520.5,2795.5 5520.5,2843.5 MCU1.21@5521,2844 ; v1(5680,3330) 5680,3385 6045,3750 6045,3871.77 I/O.14@6225,4051.77
  Bottom Layer w10: v1(5520,2795) 5600,2875 5600,3030 5680,3110 v1(5680,3330)
MISO: ISP1.2 MCU1.2 | length 883.1
  Top Layer w10: MCU1.2@5169,3196 5130.77,3196 5124.91,3201.86 5124.91,3259.91 5375,3510 5375,3845 5435,3905 ISP1.2@5435,3910
MOSI: ISP1.10 MCU1.1 | length 755.9
  Top Layer w10: MCU1.1@5169,3227 5169,3254 v1(5190,3275)
  Bottom Layer w10: ISP1.10@5035,3910 5035,3670 5190,3515 v1(5190,3275)
NetC1_1: C1.1 pwr_reg1.6 | length 131.7
  Top Layer w22: pwr_reg1.6@5348.32,1992.4 C1.1@5480,1992.44
NetC1_2: C1.2 L1.1 pwr_reg1.2 | length 273.5
  Top Layer w10: pwr_reg1.2@5261.68,1955 5281.7,1955 5303.28,1976.58 5303.28,1998.18 5362.66,2057.56 C1.2@5480,2057.56
NetC6_1: C6.1 R2.2 R4.1 | length 206.4
  Top Layer w30: C6.1@5480,1827.44 5480.23,1827.67 5579.77,1827.67 R4.1@5580,1827.9 R2.2@5680,1827.9 5677.1,1825 R2.2@5675,1825
NetC6_2: C6.2 pwr_reg1.4 R4.2 R5.1 | length 343
  Top Layer w22: pwr_reg1.4@5348.32,1917.6 5367.8,1917.6 5393.06,1892.33 C6.2@5480.23,1892.33
  Top Layer w30: C6.2@5480.23,1892.33 5579.77,1892.33 R4.2@5580,1892.1 R5.1@5580,1992.9
NetC9_1: C9.1 L2.1 MCU1.27 | length 270.6
  Top Layer w10: MCU1.27@5621,3039 5625.43,3034.57 5695,3034.57 5759.57,2970 C9.1@5762.44,2970
  Top Layer w30: C9.1@5762.44,2970 5763.72,2968.72 5763.72,2871.81 L2.1@5765,2870.53
NetC10_1: C10.1 MCU1.29 | length 156.4
  Top Layer w10: MCU1.29@5621,3101 5622,3100 5705,3100 5730.5,3074.5 5752.94,3074.5 C10.1@5762.44,3065
NetD1_2: D1.2 K1.5 Q2.3 | length 512.9
  Top Layer w30: K1.5@4131.22,1658.78 4257.44,1658.78 4378.66,1780 Q2.3@4380.63,1780 4380.32,1780.31 4380.32,1992.74 D1.2@4380,1993.06
NetD2_2: D2.2 K2.5 Q3.3 | length 509.5
  Top Layer w30: K2.5@4131.22,2328.78 4254.41,2328.78 4380,2454.37 D2.2@4380,2663.06
NetD3_2: D3.2 K3.5 Q4.3 | length 506.7
  Top Layer w30: K3.5@4136.22,2998.78 4257.44,2998.78 4379.29,3120.63 4380,3120.63 D3.2@4380,3333.06
NetD4_2: D4.2 K4.5 Q5.3 | length 506.7
  Top Layer w30: K4.5@4136.22,3668.78 4257.44,3668.78 4379.29,3790.63 4380,3790.63 D4.2@4380,4003.06
Netpwr_reg1_5: pwr_reg1.5 R1.2 R3.1 | length 286.1
  Top Layer w10: R3.1@5337.1,1710 R1.2@5337.1,1810 5337.1,1842.9 5306.72,1873.28 5306.72,1932.74 5328.98,1955 pwr_reg1.5@5348.32,1955
NetQ1_1: Q1.1 R7.1 R8.2 | length 184.6
  Top Layer w15: Q1.1@5674.37,2592.6 5675.67,2591.3 5756.6,2591.3 R8.2@5757.9,2590
  Top Layer w30: R7.1@5757.9,2490 R8.2@5757.9,2590
RPM: I/O.24 MCU1.11 | length 1449.9
  Top Layer w10: v2(5105,2805) 5105,2895 5123,2913 MCU1.11@5169,2913
  Bottom Layer w10: v2(5105,2805) 5511.77,2398.23 I/O.24@6225,2398.23
RST: ISP1.6 MCU1.4 R6.2 RST1.2 | length 1149.9
  Top Layer w10: RST1.2@4960,3435 4960,3385 5047.5,3297.5 ; MCU1.4@5164,3133 5123.91,3133 5096.91,3160 5096.91,3198.76 5065,3230.67 R6.2@5065,3232.1 5065,3280 5047.5,3297.5 ; ISP1.6@5235,3910 5235,3905 5295,3845 5295,3545 5047.5,3297.5
RX: I/O.17 MCU1.9 | length 1363.2
  Top Layer w10: MCU1.9@5169,2976 5169.5,2975.5 5218,2975.5 5218.5,2975 v1(5247,2975) ; v1(5610,3300) 5660,3300 5740,3220 5835,3220 6152.28,3537.28 6206.57,3537.28 I/O.17@6225,3555.71
  Bottom Layer w10: v1(5247,2975) 5285,2975 v1(5610,3300)
SCK: ISP1.4 MCU1.3 | length 885.5
  Top Layer w10: MCU1.3@5164,3164 5121.91,3164 5110.91,3175 5110.91,3303.28 5335,3527.38 ISP1.4@5335,3910
SET_KEY: I/O.7 MCU1.13
STAND_KEY: I/O.18 MCU1.15
TMP: I/O.12 MCU1.37 | length 1551.1
  Top Layer w10: MCU1.37@5458,3296 5463,3291 5463,3268.14 5465,3266.14 5465,2985.56 5573.04,2877.51 5573.04,2846.96 5710,2710 5931.85,2710 6146.42,2495.43 6344.33,2495.43 I/O.12@6441.54,2398.23
TX: I/O.5 MCU1.10 | length 1584.7
  Top Layer w10: MCU1.10@5169,2944 5219,2944 5220,2945 v1(5225,2945) ; v1(5610,3256) 5659,3256 5730,3185 5850,3185 6130,3465 6350.83,3465 I/O.5@6441.54,3555.71
  Bottom Layer w10: v1(5225,2945) 5299,2945 v1(5610,3256)
V_reg: C2.1 C3.1 D1.1 D2.1 D3.1 D4.1 K1.2 K2.2 K3.2 K4.2 L1.2 L2.2 MCU1.5 MCU1.17 MCU1.38 Q5.1 R2.1 R6.1 | length 6828
  Top Layer w10: R6.1@5065,3169.33 R6.1@5065,3167.9 5065,3166.46 5130,3101.46 MCU1.5@5163.54,3101.46 ; C3.1@5355,2217.56 5357.56,2215 5610,2215 5680,2145 R2.1@5680,1892.1 ; 5395,2750 v1(5420,2750) ; v1(5718.06,2838.06) 5720.22,2838.06 5727.13,2831.15 5748.22,2831.15 5765,2814.37 L2.2@5765,2809.47
  Top Layer w15: MCU1.5@5169,3101 5380.75,3101 5410.5,3071.25 ; C3.1@5355,2217.56 5355,2508.93 5395,2548.93 5395,2750 MCU1.17@5395,2844 5395,3055.75 5410.5,3071.25 ; MCU1.38@5426,3296 5426,3086.75 5410.5,3071.25
  Top Layer w30: D2.1@4380,2796.94 4380,2800.84 4379.62,2801.22 K2.2@4131.22,2801.22 ; D3.1@4380,3466.94 4380,3470.84 4379.62,3471.22 K3.2@4136.22,3471.22 ; D4.1@4380,4136.94 4380,4140.84 4379.62,4141.22 K4.2@4136.22,4141.22 4071.85,4076.85 4071.85,3642.12 4136.22,3577.75 ; Q5.1@4459.37,3752.6 4457.4,3752.6 4282.55,3577.75 4136.22,3577.75 ; L1.2@5040,2230.98 5030.32,2230.98 5013.82,2247.48 5013.82,2259.06 4999.17,2273.7 4712.59,2273.7 4565.83,2126.94 D1.1@4380,2126.94 4380,2128.7 4379.62,2129.08 4133.36,2129.08 K1.2@4131.22,2131.22 4131.22,2237.75 4066.85,2302.12 4066.85,2736.85 K2.2@4131.22,2801.22 ; K2.2@4131.22,2801.22 4131.22,2890.24 4071.85,2949.61 4071.85,3406.85 K3.2@4136.22,3471.22 ; K3.2@4136.22,3471.22 4136.22,3577.75
  Bottom Layer w10: v1(5420,2750) 5585,2750 5655,2820 5700,2820 v1(5718.06,2838.06)
VCC_bat: C4.1 C5.1 K3.3 PWR.2 pwr_reg1.3 R1.1 | length 4936.8
  Top Layer w22: C5.1@5151.06,1861.5 5207.17,1917.6 pwr_reg1.3@5261.68,1917.6
  Top Layer w30: v3(5020,1435) 5025,1435 5195,1605 ; C5.1@5150,1852.56 5155.08,1852.56 5157.56,1850.08 C4.1@5157.56,1755 5157.56,1642.44 5195,1605 ; C5.1@5150,1857.56 5223.9,1857.56 5271.46,1810 R1.1@5272.9,1810 ; PWR.2@6420,1855 6170,1605 5195,1605
  Bottom Layer w30: K3.3@4214.96,3235 3980,3000.04 3980,1640 4185,1435 v3(5020,1435)
VCC_k: PWR.1 R7.2 | length 792.4
  Top Layer w15: R7.2@5822.1,2490 5823.54,2490 6113.54,2200 6240.35,2200 PWR.1@6420,2020.35
VCC_rect: K1.3 PWR.3 | length 2396.2
  Bottom Layer w30: K1.3@4209.96,1895 4209.96,1770.04 4420,1560 5743.11,1560 PWR.3@6203.46,2020.35
X1: C7.2 MCU1.8 XTAL1.1 | length 326.9
  Top Layer w15: XTAL1.1@5000.28,2910.2 5000.28,2914.13 5093.14,3007 MCU1.8@5169,3007
  Top Layer w30: C7.2@4942.56,2820 4945.43,2820 4995.43,2870 4995.43,2905.35 XTAL1.1@5000.28,2910.2
X2: C8.2 MCU1.7 XTAL1.3 | length 375.9
  Top Layer w15: XTAL1.3@4909.72,3059.8 4909.72,3055.87 4950.78,3014.81 5037.05,3014.81 5061.24,3039 MCU1.7@5169,3039
  Top Layer w30: C8.2@4825,3057.56 4826.12,3058.68 4908.6,3058.68 XTAL1.3@4909.72,3059.8
pads on no net: I/O.4 I/O.10 I/O.20 I/O.21 I/O.22 I/O.MH1 I/O.MH2 ISP1.5 ISP1.7 ISP1.8 ISP1.9 K1.1 K1.4 K2.1 K2.3 K2.4 K3.4 K4.4 MCU1.31 MCU1.32 MCU1.33 MCU1.34 MCU1.35 MCU1.40 MCU1.41 MCU1.42 MCU1.43 MCU1.44 Q2.1 Q3.1 Q4.1 RST1.3

## Polygon pours and split planes (outlines as drawn)
V_reg on Top Layer "NONET_L01_P002" (solid, shelved, pour order 2): 5380,2190 4895,2190 4895,2270 4900,2275 5375,2275 5380,2270
NetC1_2 on Top Layer "NONET_L01_P000" (solid, shelved, pour order 0): 5290,1940 4990,1940 4990,2017.2 4988.82,2018.39 4990.43,2020 5165,2020 5215,1970 5290,1970
V_reg on Top Layer "NONET_L01_P005" (solid, shelved, pour order 5): 5201.2,2189.9 4990,2189.9 4990,2270 5200,2270
GND on Top Layer "NONET_L01_P003" (solid, shelved, pour order 3): 3340,4470 3340,1330 7005,1330 7005,4470
NetC1_2 on Top Layer "NONET_L01_P006" (solid, shelved, pour order 6): 5140,1940 4990,1940 4990,2017.2 4992.8,2020 5120,2020 5120,1960
GND on Bottom Layer "NONET_L02_P007" (solid, shelved, pour order 7): 3340,4470 7005,4470 7005,1330 3340,1330

## Other copper
Top Layer:
  pour cut-out: 5184.99,2190 4895,2190 4895,2018.39 5178.39,2018.39 5185.22,2025.22
  pour cut-out: 5185.22,2190 4895,2190 4895,2025 5185,2025 5185.22,2025.22

## Text inside footprints (layer, text, board x,y; h text height)
MCU1: Top Overlay "*" at 5145,3280 h50; Mechanical 13 "*" at 5092,3233 h50